# EAGLE board LCmeter0-perfboard2 (EAGLE 7.3.0)
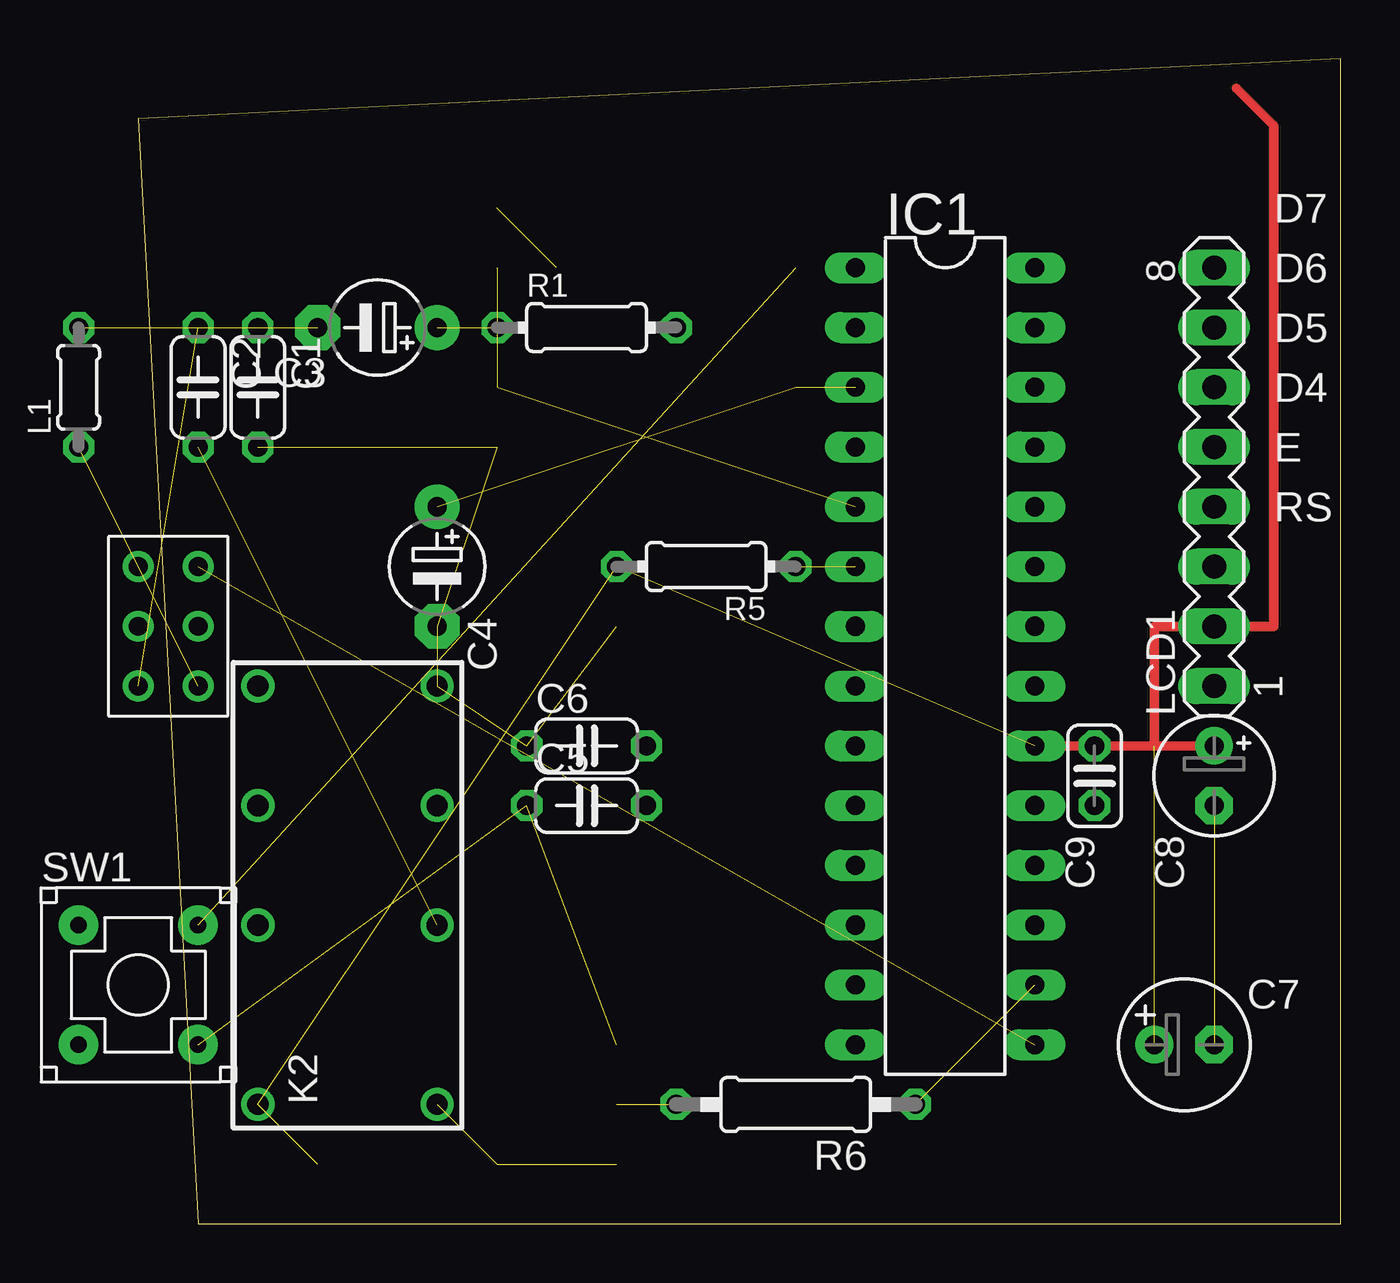
[diagram p0: board, top side]
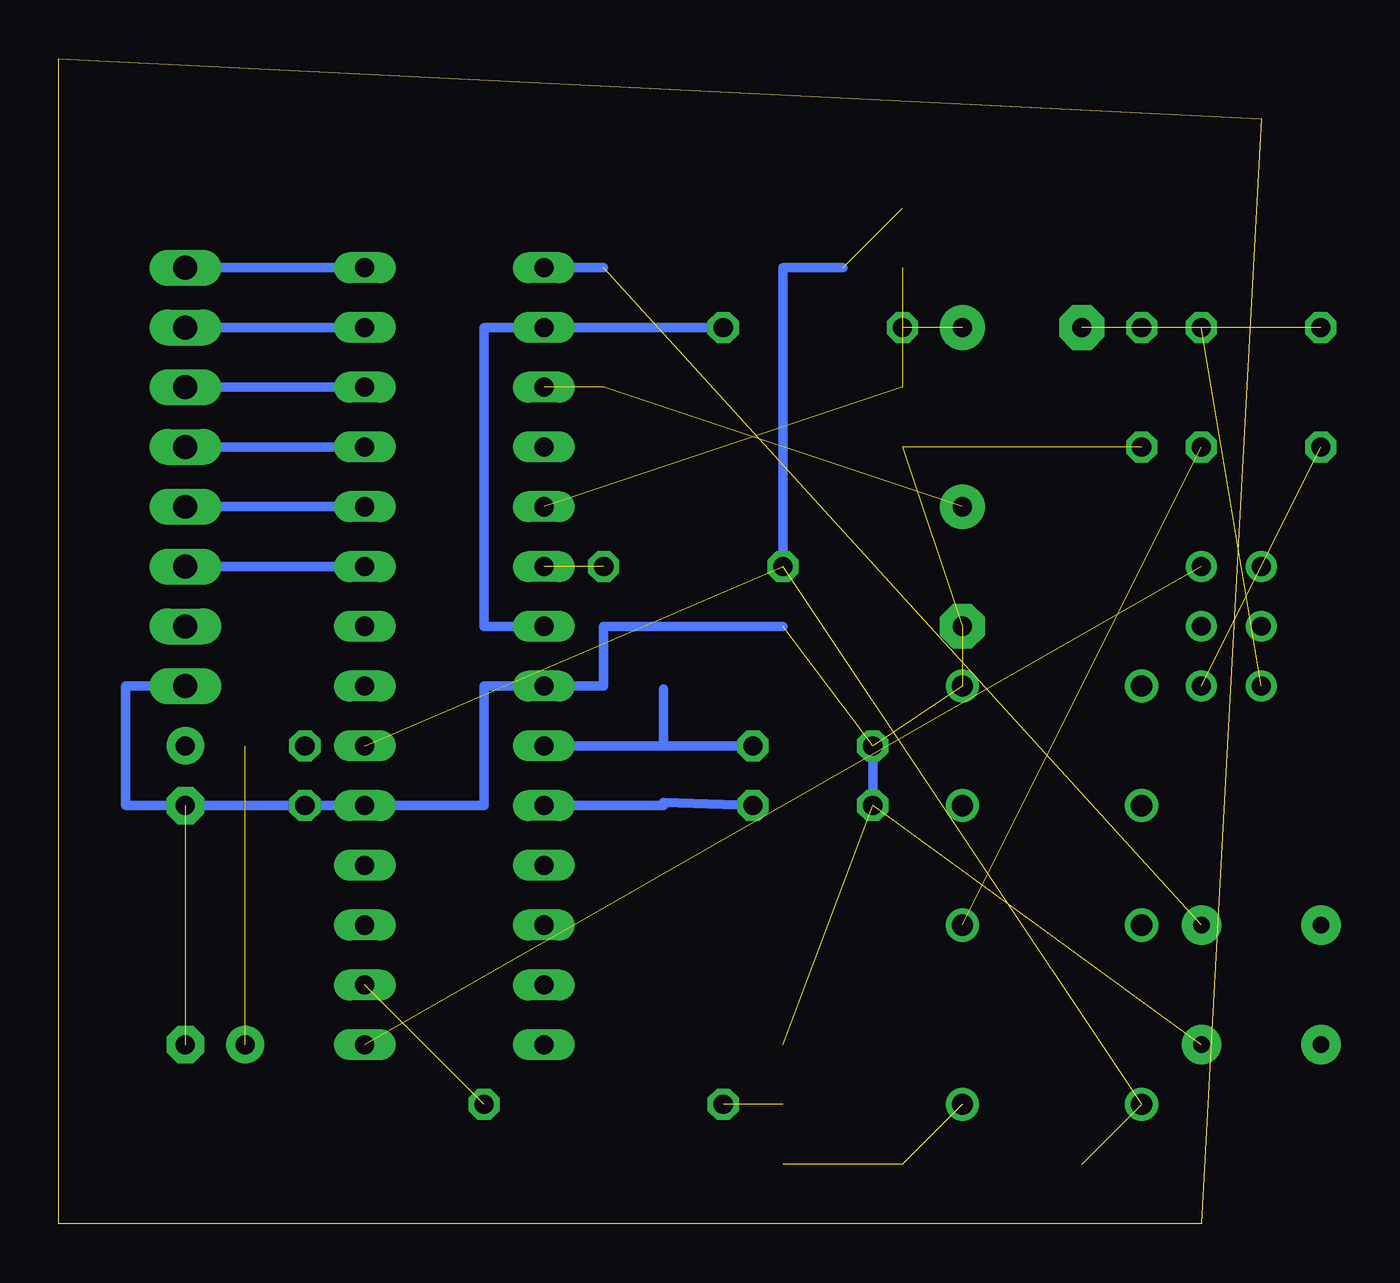
[diagram p1: board, bottom side, seen from below]

Size 51.1 x 49.52 mm. Coordinates in mm from the lower left corner, seen from the top.
Outline: 2.54,0 51.1,0 51.1,49.52 0,46.98 2.54,0
Copper layers (1*16): Top 0.035mm / dielectric 1.5mm / Bottom 0.035mm
Design rules "default": minimum track width 10mil, minimum drill 24mil, track to track 8mil, track to pad 8mil, pad to pad 8mil, via to via 8mil, smd to smd 8mil, copper to edge 40mil, drill to drill 8mil, minimum pad ring 10mil, minimum via ring 8mil, stop-mask expansion 4mil, vias tented up to drill 0mil, thermal gap 10mil

## Footprints (pad centres in the part's own frame; a part is rotated, then mirrored left to right if it is on the bottom)
C050-024X044 = drill 0.813 octagon: 1 -2.54,0; 2 2.54,0
E5-4 = drill 0.813 pad 1.905: + -2.54,0 | drill 0.813 pad 1.905 octagon: - 2.54,0
E2,5-6 = drill 0.813 pad 1.6: + -1.27,0 | drill 0.813 pad 1.6 octagon: - 1.27,0
E2,5-5 = drill 0.813 pad 1.6: + -1.27,0 | drill 0.813 pad 1.6 octagon: - 1.27,0
C025-024X044 = drill 0.813 octagon: 1 -1.27,0; 2 1.27,0
DIL28-3 = drill 0.813 long: 1 -16.51,-3.81; 2 -13.97,-3.81; 3 -11.43,-3.81; 4 -8.89,-3.81; 5 -6.35,-3.81; 6 -3.81,-3.81; 7 -1.27,-3.81; 8 1.27,-3.81; 9 3.81,-3.81; 10 6.35,-3.81; 11 8.89,-3.81; 12 11.43,-3.81; 13 13.97,-3.81; 14 16.51,-3.81; 15 16.51,3.81; 16 13.97,3.81; 17 11.43,3.81; 18 8.89,3.81; 19 6.35,3.81; 20 3.81,3.81; 21 1.27,3.81; 22 -1.27,3.81; 23 -3.81,3.81; 24 -6.35,3.81; 25 -8.89,3.81; 26 -11.43,3.81; 27 -13.97,3.81; 28 -16.51,3.81
DS2Y = drill 0.9: 1 -8.89,-3.81; 4 -1.27,-3.81; 6 3.81,-3.81; 8 8.89,-3.81; 9 8.89,3.81; 11 3.81,3.81; 13 -1.27,3.81; 16 -8.89,3.81
0204/5 = drill 0.813 octagon: 1 -2.54,0; 2 2.54,0
MA08-1 = drill 1.016 long: 1 -8.89,0; 2 -6.35,0; 3 -3.81,0; 4 -1.27,0; 5 1.27,0; 6 3.81,0; 7 6.35,0; 8 8.89,0
0204/7 = drill 0.813 octagon: 1 -3.81,0; 2 3.81,0
0207/10 = drill 0.813 octagon: 1 -5.08,0; 2 5.08,0
PB-5 = drill 0.7 pad 1.676: 1 2.54,-2.54; 2 -2.54,-2.54; 3 2.54,2.54; 4 -2.54,2.54
DPDT = drill 0.8: 1-1 0,1.27; 1-2 -2.54,1.27; 1-3 2.54,1.27; 2-1 0,-1.27; 2-2 -2.54,-1.27; 2-3 2.54,-1.27

## Placement (x,y rotation side)
C1  1nF  [C050-024X044]  5.08,35.56 270 top
C2  1nF  [C050-024X044]  2.54,35.56 270 top
C3  10μF  [E5-4]  10.16,38.1 180 top
C4  10μF  [E5-4]  12.7,27.94 270 top
C5  33pF  [C050-024X044]  19.05,17.78 0 top
C6  33pF  [C050-024X044]  19.05,20.32 0 top
C7  100μF  [E2,5-6]  44.45,7.62 0 top
C8  10μF  [E2,5-5]  45.72,19.05 270 top
C9  100nF  [C025-024X044]  40.64,19.05 270 top
D1  1N4148  [DO35-7]  11.43,2.54 180 top
IC1  PIC16F876A-X/SP  [DIL28-3]  34.29,24.13 270 top
K2  DS2Y  [DS2Y]  8.89,13.97 90 top
L1  100μH  [0204/5]  -2.54,35.56 90 top
LCD1  HD44780  [MA08-1]  45.72,31.75 90 top
Q1  20MHz  [HC49/S]  25.4,20.32 270 top
Q2  BC548  [TO92-EBC]  19.05,5.08 90 top
R1  100kΩ  [0204/7]  19.05,38.1 0 top
R2  100kΩ  [0204V]  15.24,34.29 90 top
R3  100kΩ  [0204V]  15.24,41.91 90 top
R4  47kΩ  [0204V]  27.94,36.83 90 top
R5  4.7kΩ  [0204/7]  24.13,27.94 180 top
R6  10kΩ  [0207/10]  27.94,5.08 180 top
R10  4.7kΩ  [0207/10']  22.86,40.64 180 top
SW1  SPST  [PB-5]  0,10.16 0 top
SW2  DPDT  [DPDT]  1.27,25.4 90 top

## Library data of the parts
C1-C9 L1 R1 R5 R6 = rcl
D1 = d
IC1 SW1 SW2 = mcu
K2 = relay; MPN: DS2Y-S-DC5V; OC_FARNELL: unknown; OC_NEWARK: 13P3268
LCD1 = con-lstb; OC_FARNELL: unknown; OC_NEWARK: unknown
Q1 = q; OC_FARNELL: 1667008; OC_NEWARK: unknown
Q2 = t
R2-R4 R10 = r

## Nets
/LC: IC1.15 SW2.2-3
/MCLR: IC1.1 R10.1 SW1.3
/RELAY: D1.C K2.1 Q2.C
A0: IC1.2 IC1.7 R1.2 R4.2
A1: C4.+ IC1.3 R4.1
A3: C3.+ IC1.5 R1.1 R2.2 R3.1
A4: IC1.6 R5.1
C2_CON: C2.2 K2.4
D4: IC1.25 LCD1.5
D5: IC1.26 LCD1.6
D6: IC1.27 LCD1.7
D7: IC1.28 LCD1.8
E: IC1.24 LCD1.4
GND: C1.2 C4.- C5.1 C6.1 C7.- C8.- C9.2 IC1.8 IC1.19 K2.8 LCD1.1 Q2.E R2.1 SW1.1
N$2: C1.1 C2.1 C3.- L1.2 SW2.1-2
N$5: Q2.B R6.2
N$7: L1.1 SW2.1-3 SW2.2-2
OSC1: C6.2 IC1.9 Q1.1
OSC2: C5.2 IC1.10 Q1.2
RC5: IC1.16 R6.1
RS: IC1.23 LCD1.3
VCC: C7.+ C8.+ C9.1 D1.A IC1.20 K2.16 LCD1.2 R3.2 R5.2 R10.2

## Tracks (layer width: path | path; a pad name or v marks a point on that pad's centre or on a via)
/LC  (1 unrouted)
/MCLR  (1 unrouted)
  Bottom 0.406: IC1.1 27.94,40.64
/RELAY  (2 unrouted)
A0
  Bottom 0.406: IC1.7 33.02,25.4 33.02,38.1 IC1.2 27.94,38.1 R1.2
A1  (2 unrouted)
A3  (4 unrouted)
A4  (1 unrouted)
C2_CON  (1 unrouted)
D4
  Bottom 0.406: IC1.25 LCD1.5
D5
  Bottom 0.406: IC1.26 LCD1.6
D6
  Bottom 0.406: IC1.27 LCD1.7
D7
  Bottom 0.406: IC1.28 LCD1.8
E
  Bottom 0.406: IC1.24 LCD1.4
GND  (8 unrouted)
  Bottom 0.406: LCD1.1 48.26,22.86 48.26,17.78 C8.- | C8.- C9.2 | C8.- IC1.19 33.02,17.78 33.02,22.86 IC1.8 27.94,22.86 27.94,25.4 20.32,25.4 | C5.1 C6.1
N$2  (4 unrouted)
N$5  (1 unrouted)
N$7  (2 unrouted)
OSC1
  Bottom 0.406: IC1.9 25.4,20.32 | 25.4,20.32 25.4,22.73 | C6.2 25.4,20.32
OSC2
  Bottom 0.406: IC1.10 25.4,17.78 25.4,17.91 C5.2
RC5  (1 unrouted)
RS
  Bottom 0.406: IC1.23 LCD1.3
VCC  (5 unrouted)
  Top 0.406: 46.67,48.26 48.26,46.67 48.26,25.4 LCD1.2 43.18,25.4 43.18,20.32 C9.1 C8.+ IC1.20
  Bottom 0.406: 17.78,40.64 20.32,40.64 R5.2

## Text on the board
tPlace: D7 | D6 | D5 | D4 | E | RS